# EAGLE board E DX (EAGLE 5.07)
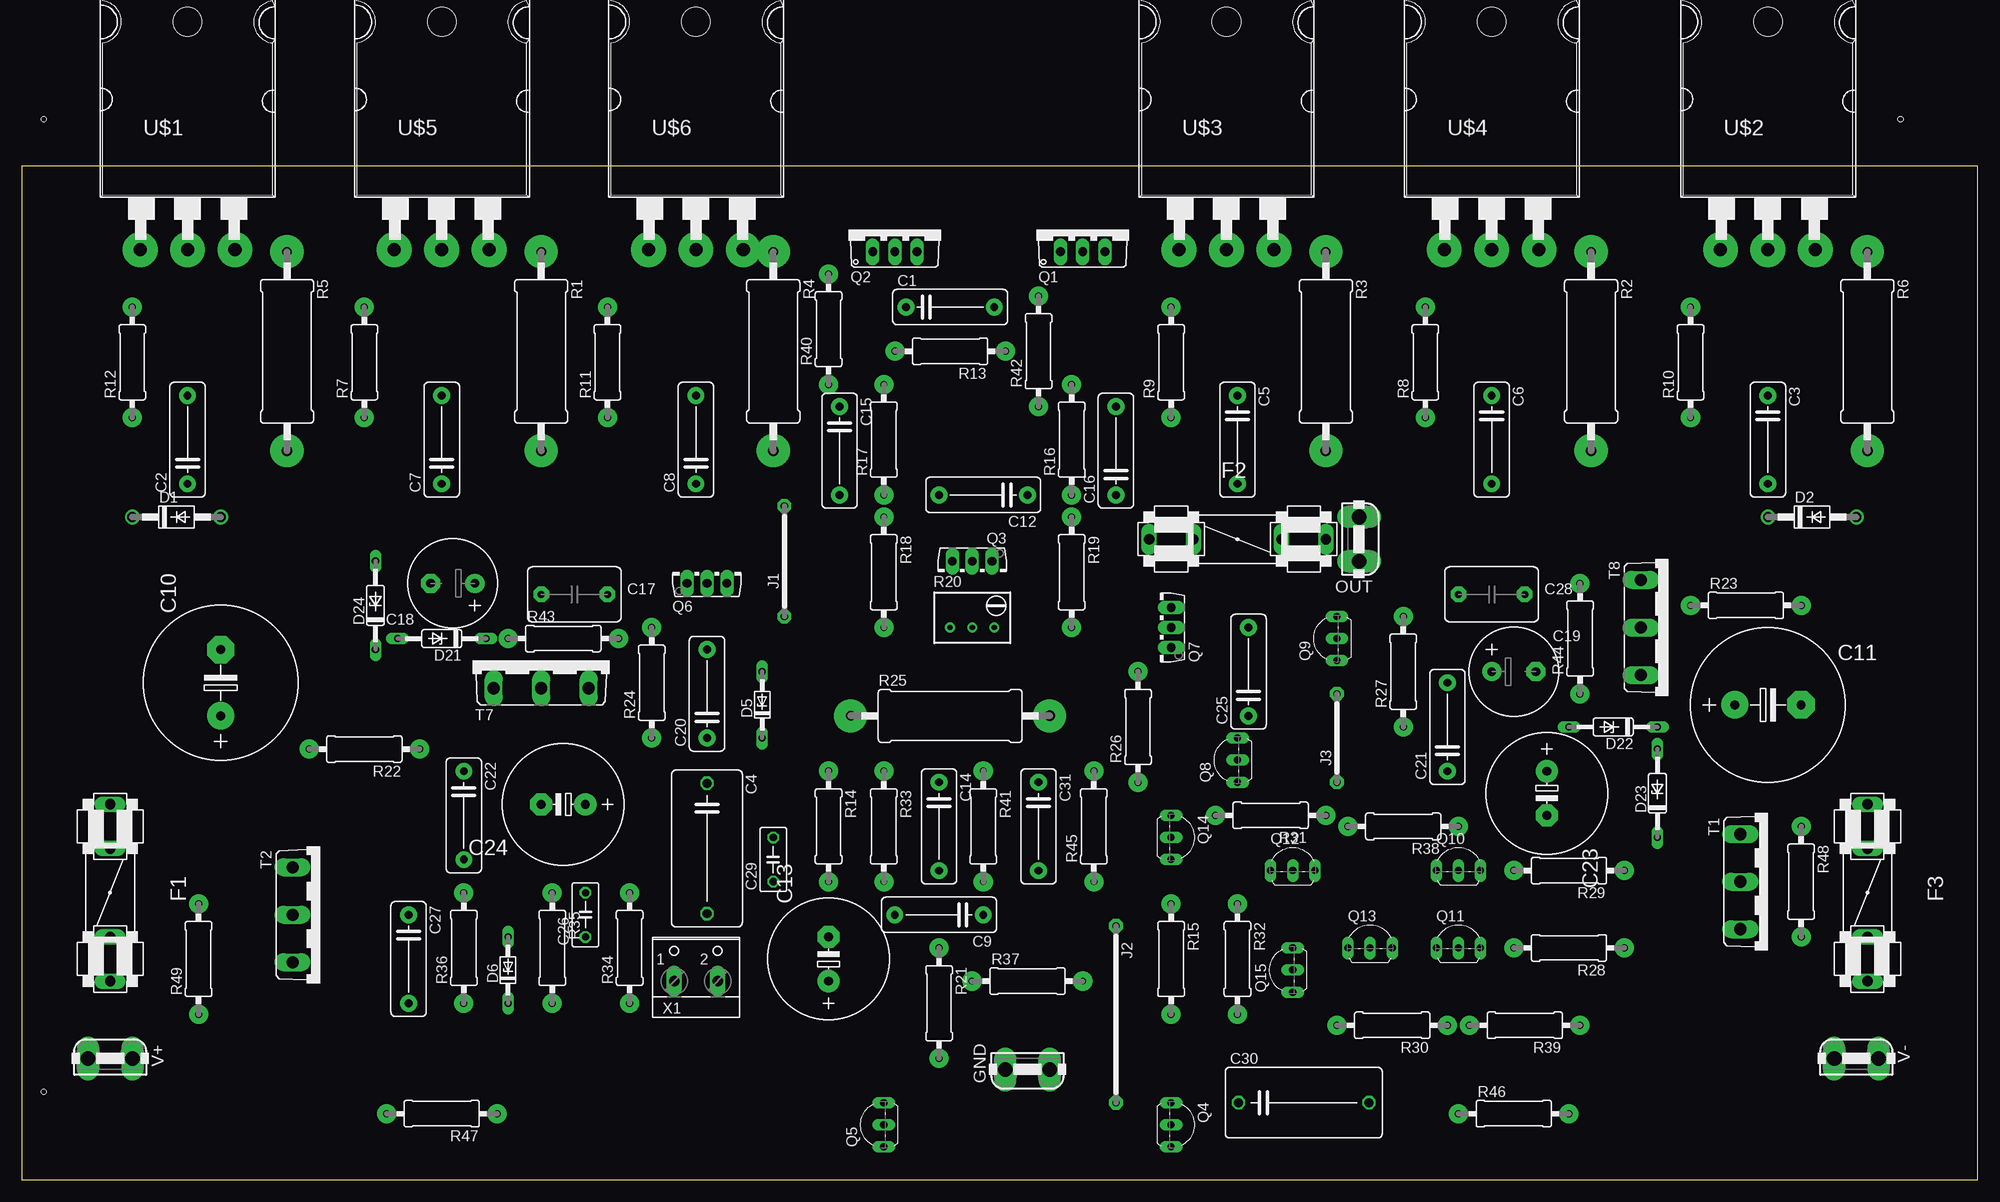
[diagram p0: board, top side]
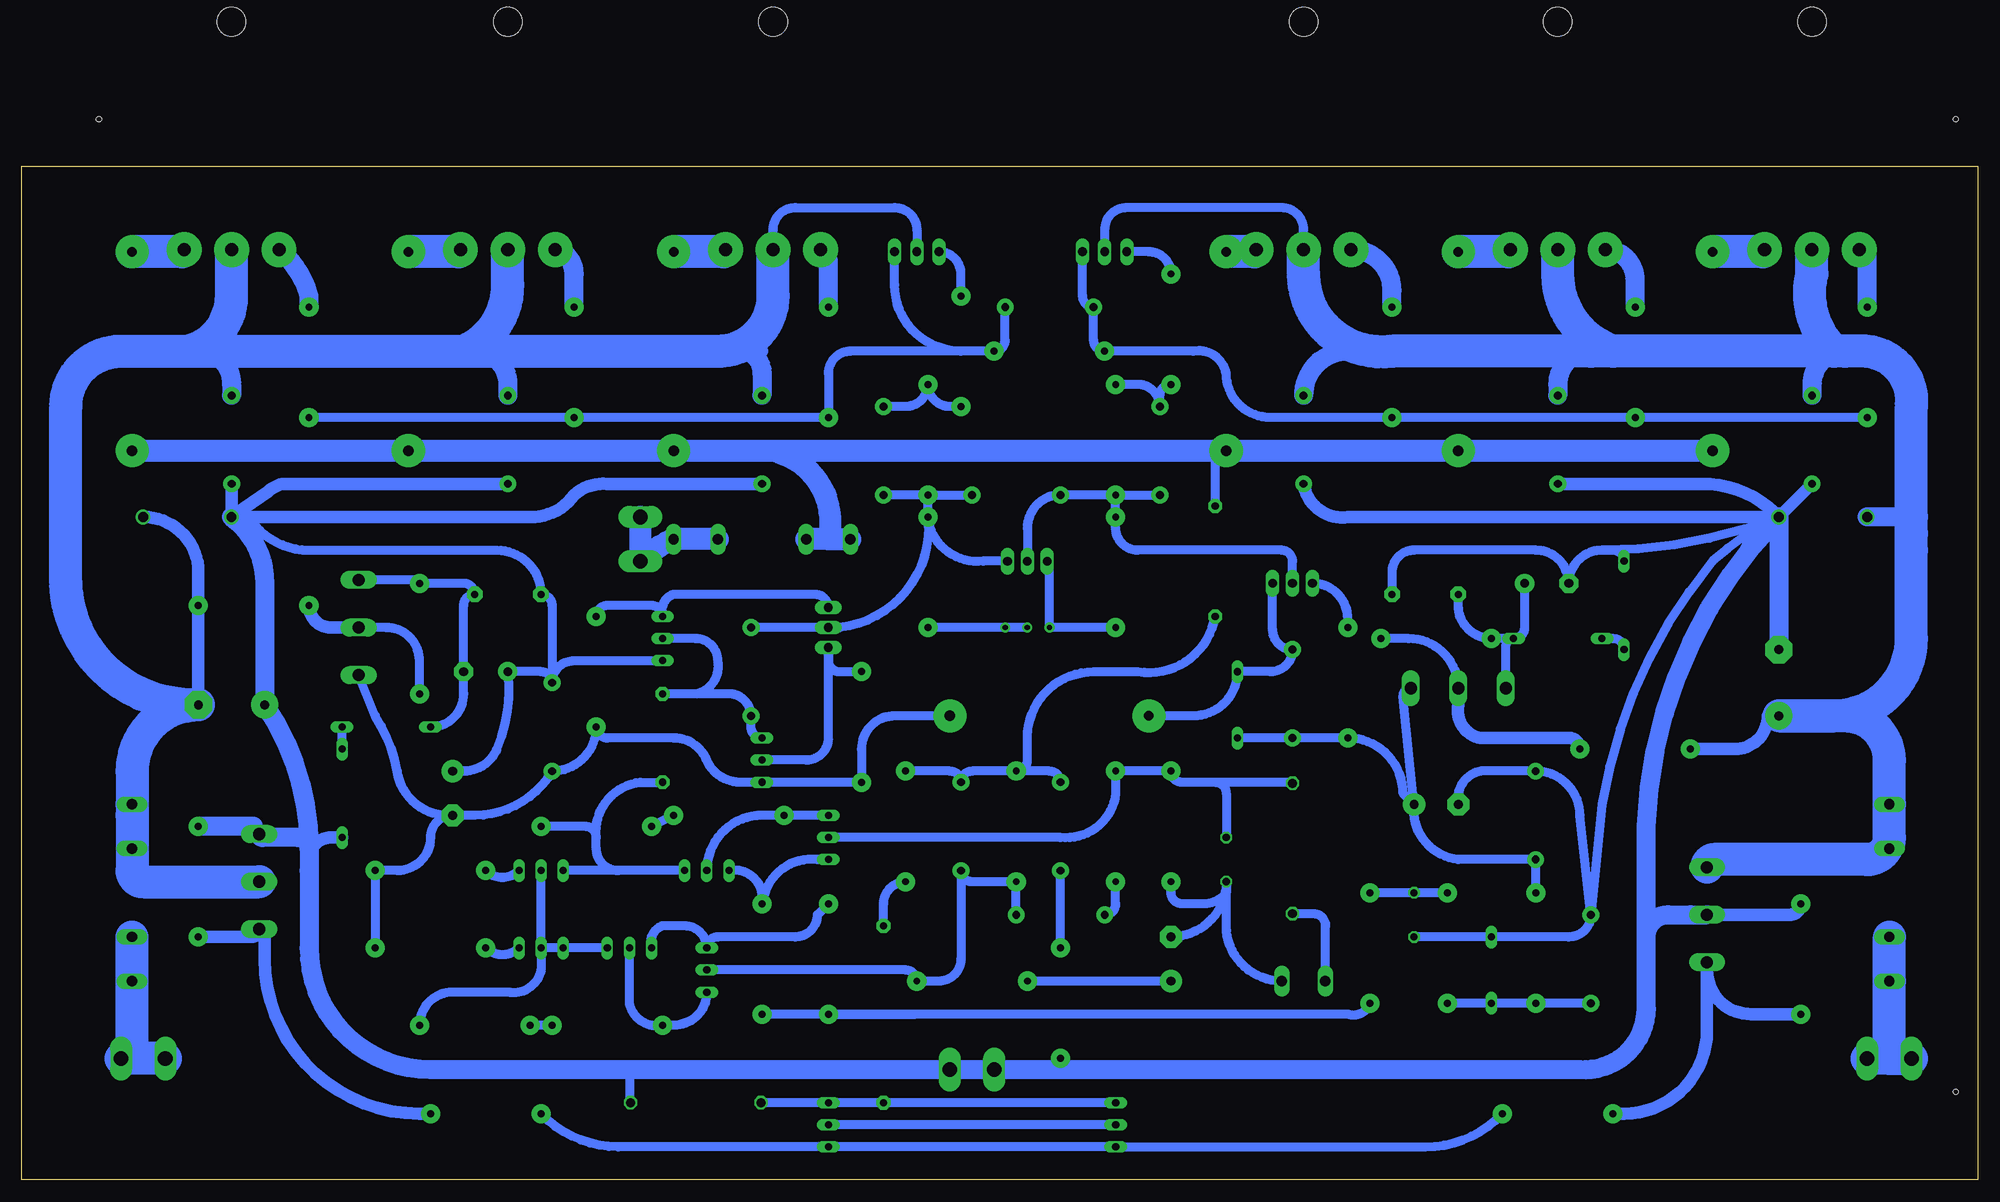
[diagram p1: board, bottom side, seen from below]

Size 224.77 x 116.51 mm. Coordinates in mm from the lower left corner, seen from the top.
Outline: 0,0 224.77,0 224.77,116.51 0,116.51 0,0
Copper layers (1*16): Top 0.035mm / dielectric 1.5mm / Bottom 0.035mm
Design rules "default *": minimum track width 10mil, minimum drill 30mil, track to track 8mil, track to pad 8mil, pad to pad 8mil, via to via 8mil, smd to smd 8mil, copper to edge 40mil, drill to drill 8mil, minimum pad ring 10mil, minimum via ring 8mil, stop-mask expansion 4mil, vias tented up to drill 0mil, thermal gap 10mil
Holes 0.6 mm at 2.54,10.16 2.54,121.92 215.9,121.92

## Footprints (pad centres in the part's own frame; a part is rotated, then mirrored left to right if it is on the bottom)
C102-043X133 = drill 0.9 pad 1.93 round: 1 -5.08,0; 2 5.08,0
C150-084X183 = drill 1.016 octagon: 1 -7.493,0; 2 7.493,0
E7,5-18 = drill 1.016 pad 3.15 round: + -3.81,0 | drill 1.016 pad 3.15 octagon: - 3.81,0
E5-13 = drill 1.016 pad 2.54 round: + -2.54,0 | drill 1.016 pad 2.54 octagon: - 2.54,0
C7,5-11,0X7,0 = drill 0.813 pad 1.778 octagon: 1 -3.81,0; 2 3.81,0
E5,0-10 = drill 1.016 pad 2.184 round: + -2.54,0 | drill 1.016 pad 2.184 octagon: - 2.54,0
C050-030X075 = drill 0.813 octagon: 1 -2.54,0; 2 2.54,0
DO41-10 = drill 1.118 round: A 5.08,0; C -5.08,0
DO34Z7 = drill 0.813 long: A 3.81,0; C -3.81,0
DO35Z10 = drill 0.813 long: A 5.08,0; C -5.08,0
FUSE1 = drill 1.194 long: 1A -10.16,0; 1B -5.08,0; 2A 10.16,0; 2B 5.08,0
FASTON = drill 1.676 pad 2.54 long: 1 -2.54,0; 2 2.54,0
12 = drill 0.813 pad 1.6 octagon: 1 -6.35,0; 2 6.35,0
20 = drill 0.813 pad 1.6 octagon: 1 -10.16,0; 2 10.16,0
10 = drill 0.813 pad 1.6 octagon: 1 -5.08,0; 2 5.08,0
TO220AV = drill 1.016 long: B -2.54,-2.54; C 0,-2.54; E 2.54,-2.54
TO126AV = drill 1.016 long: B 2.286,-1.27; C 0,-1.27; E -2.286,-1.27
TO92-EBC = drill 0.813 long: B 0,-1.27; C -2.54,-1.27; E 2.54,-1.27
TO92-EBC' = drill 0.813 long: B 0,-1.27; C 2.54,-1.27; E -2.54,-1.27
0617/22 = drill 1.1 pad 3.81 round: 1 -11.43,0 | drill 1.2 pad 3.81 round: 2 11.43,0
0309/12 = drill 0.8 pad 2.184 round: 1 -6.35,0; 2 6.35,0
RTRIM3299W = drill 0.61 round: 1 1.27,-2.54; 2 1.27,0; 3 1.27,2.54
TOP3S-1 = drill 1.397 long: A1 -5.461,-3.175; A2 0,-3.175; G 5.461,-3.175
TOP3AV = drill 1.397 long: B -5.461,-3.175; C 0,-3.175; E 5.461,-3.175
TO-264 = drill 1.5 pad 4 round: B -5.45,-6.096; E 5.45,-6.096 | drill 1.499 pad 4 round: C 0,-6.096 | hole 3.3: 0,20.09
W237-102 = drill 1.194 long: 1 -2.5,-1.27; 2 2.5,-1.27

## Placement (x,y rotation side)
C1  .1  [C102-043X133]  106.68,100.33 0 top
C2  .1  [C102-043X133]  19.05,85.09 90 top
C3  .1  [C102-043X133]  200.66,85.09 270 top
C4  10uF  [C150-084X183]  78.74,38.1 270 top
C5  .1  [C102-043X133]  139.7,85.09 270 top
C6  .1  [C102-043X133]  168.91,85.09 270 top
C7  .1  [C102-043X133]  48.26,85.09 90 top
C8  .1  [C102-043X133]  77.47,85.09 90 top
C9  100pF  [C102-043X133]  105.41,30.48 180 top
C10  470uF  [E7,5-18]  22.86,57.15 90 top
C11  470uF  [E7,5-18]  200.66,54.61 0 top
C12  2.2uF  [C102-043X133]  110.49,78.74 180 top
C13  470uF  [E5-13]  92.71,25.4 90 top
C14  .1  [C102-043X133]  105.41,40.64 270 top
C15  68nF  [C102-043X133]  93.98,83.82 270 top
C16  68nF  [C102-043X133]  125.73,83.82 90 top
C17  .1  [C7,5-11,0X7,0]  63.5,67.31 0 top
C18  47uF  [E5,0-10]  49.53,68.58 180 top
C19  47uF  [E5,0-10]  171.45,58.42 0 top
C20  .1  [C102-043X133]  78.74,55.88 90 top
C21  .1  [C102-043X133]  163.83,52.07 90 top
C22  .1  [C102-043X133]  50.8,41.91 270 top
C23  220uF  [E5-13]  175.26,44.45 270 top
C24  220uF  [E5-13]  62.23,43.18 180 top
C25  68pF  [C102-043X133]  140.97,58.42 90 top
C26  10nF  [C050-030X075]  64.77,30.48 90 top
C27  .1  [C102-043X133]  44.45,25.4 270 top
C28  .1  [C7,5-11,0X7,0]  168.91,67.31 0 top
C29  220pF  [C050-030X075]  86.36,36.83 90 top
C30  22uF  [C150-084X183]  147.32,8.89 0 top
C31  27pF  [C102-043X133]  116.84,40.64 270 top
D1  1N4004  [DO41-10]  17.78,76.2 0 top
D2  1N4004  [DO41-10]  205.74,76.2 0 top
D5  4.7V  [DO34Z7]  85.09,54.61 90 top
D6  12V  [DO34Z7]  55.88,24.13 90 top
D21  12V  [DO35Z10]  48.26,62.23 180 top
D22  12V  [DO35Z10]  182.88,52.07 180 top
D23  33V  [DO35Z10]  187.96,44.45 90 top
D24  33V  [DO35Z10]  40.64,66.04 90 top
F1  4A  [FUSE1]  10.16,33.02 270 top
F2  4A  [FUSE1]  139.7,73.66 0 top
F3  4A  [FUSE1]  212.09,33.02 270 top
GND  GND  [FASTON]  115.57,12.7 0 top
J1  J12MM  [12]  87.63,71.12 90 top
J2  J20MM  [20]  125.73,19.05 270 top
J3  J10MM  [10]  151.13,50.8 90 top
OUT  QFIT  [FASTON]  153.67,73.66 90 top
Q1  PNP  [TO220AV]  121.92,109.22 0 top
Q2  NPN  [TO220AV]  100.33,109.22 0 top
Q3  KSC2690  [TO126AV]  109.22,69.85 180 top
Q4  X0202MA  [TO92-EBC]  133.35,6.35 270 top
Q5  X0202MA  [TO92-EBC]  97.79,6.35 90 top
Q6  BD140  [TO126AV]  78.74,69.85 0 top
Q7  KSC2690  [TO126AV]  130.81,63.5 90 top
Q8  BC547C  [TO92-EBC']  138.43,48.26 90 top
Q9  BC546B  [TO92-EBC]  149.86,62.23 90 top
Q10  BC546B  [TO92-EBC]  165.1,36.83 0 top
Q11  BC546B  [TO92-EBC]  165.1,27.94 0 top
Q12  BC546B  [TO92-EBC]  146.05,36.83 0 top
Q13  BC546B  [TO92-EBC]  154.94,27.94 0 top
Q14  BC556A  [TO92-EBC]  133.35,39.37 270 top
Q15  BC556A  [TO92-EBC]  144.78,24.13 90 top
R1  .1R  [0617/22]  59.69,95.25 270 top
R2  .1R  [0617/22]  180.34,95.25 270 top
R3  .1R  [0617/22]  149.86,95.25 270 top
R4  .1R  [0617/22]  86.36,95.25 270 top
R5  .1R  [0617/22]  30.48,95.25 270 top
R6  .1R  [0617/22]  212.09,95.25 270 top
R7  5.6R  [0309/12]  39.37,93.98 90 top
R8  5.6R  [0309/12]  161.29,93.98 90 top
R9  5.6R  [0309/12]  132.08,93.98 90 top
R10  5.6R  [0309/12]  191.77,93.98 90 top
R11  5.6R  [0309/12]  67.31,93.98 90 top
R12  5.6R  [0309/12]  12.7,93.98 90 top
R13  180  [0309/12]  106.68,95.25 180 top
R14  10K  [0309/12]  92.71,40.64 270 top
R15  47R  [0309/12]  132.08,25.4 270 top
R16  100R  [0309/12]  120.65,85.09 90 top
R17  100R  [0309/12]  99.06,85.09 90 top
R18  2.2K  [0309/12]  99.06,69.85 270 top
R19  390  [0309/12]  120.65,69.85 270 top
R20  500R  [RTRIM3299W]  109.22,64.77 270 top
R21  5.6R  [0309/12]  105.41,20.32 270 top
R22  100R  [0309/12]  39.37,49.53 180 top
R23  100R  [0309/12]  198.12,66.04 0 top
R24  390R  [0309/12]  72.39,57.15 90 top
R25  10K  [0617/22]  106.68,53.34 0 top
R26  22R  [0309/12]  128.27,52.07 90 top
R27  1K  [0309/12]  158.75,58.42 90 top
R28  82R  [0309/12]  177.8,26.67 180 top
R29  82R  [0309/12]  177.8,35.56 180 top
R30  1.5K  [0309/12]  157.48,17.78 180 top
R31  1.5K  [0309/12]  143.51,41.91 180 top
R32  47R  [0309/12]  139.7,25.4 270 top
R33  82  [0309/12]  99.06,40.64 270 top
R34  3.6K  [0309/12]  69.85,26.67 90 top
R35  4.7K  [0309/12]  60.96,26.67 270 top
R36  2.2K  [0309/12]  50.8,26.67 90 top
R37  390  [0309/12]  115.57,22.86 0 top
R38  100R  [0309/12]  158.75,40.64 180 top
R39  100R  [0309/12]  172.72,17.78 180 top
R40  100R  [0309/12]  92.71,97.79 90 top
R41  10K  [0309/12]  110.49,40.64 270 top
R42  100R  [0309/12]  116.84,95.25 90 top
R43  1K  [0309/12]  62.23,62.23 0 top
R44  1K  [0309/12]  179.07,62.23 90 top
R45  22K  [0309/12]  123.19,40.64 90 top
R46  10R  [0309/12]  171.45,7.62 0 top
R47  10R  [0309/12]  48.26,7.62 180 top
R48  220R  [0309/12]  204.47,34.29 270 top
R49  220R  [0309/12]  20.32,25.4 90 top
T1  BTA41  [TOP3S-1]  200.66,34.29 270 top
T2  BTA41  [TOP3S-1]  34.29,30.48 270 top
T7  2SC5200  [TOP3AV]  59.69,59.69 0 top
T8  2SA1943  [TOP3AV]  189.23,63.5 270 top
U$1  2SC5200  [TO-264]  19.05,113.03 0 top
U$2  2SA1943  [TO-264]  200.66,113.03 0 top
U$3  2SA1943  [TO-264]  138.43,113.03 0 top
U$4  2SA1943  [TO-264]  168.91,113.03 0 top
U$5  2SC5200  [TO-264]  48.26,113.03 0 top
U$6  2SC5200  [TO-264]  77.47,113.03 0 top
V+  QFIT  [FASTON]  10.16,13.97 180 top
V-  QFIT  [FASTON]  210.82,13.97 180 top
X1  IN  [W237-102]  77.47,24.13 0 top

## Library data of the parts
C1-C16 C20-C27 C29-C31 R1-R49 = resistor
C17-C19 C28 = cap-pan40
D1 D2 D5 D6 D21-D24 = diode
F1-F3 = special
GND OUT V+ V- = keystone
J1-J3 = jumper
Q1-Q3 Q6 Q7 T7 T8 = transistor-power
Q4 Q5 Q9-Q13 = transistor-npn
Q8 = transistor
Q14 Q15 = transistor-pnp
T1 T2 = triac
U$1-U$6 = Rudi_TO264
X1 = con-wago-500

## Nets
AGND: C13.- C29.1 R14.2 X1.2
GND: C2.1 C3.2 C5.2 C6.2 C7.1 C8.1 C10.- C11.+ C17.2 C18.- C19.+ C21.2 C22.1 C23.+ C24.- C26.1 C27.1 C28.1 C30.2 D1.A D2.C D6.A D23.C D24.A GND.1 GND.2 Q9.C R21.2 R48.1 R49.2 T1.A1 T2.A2
N$1: R1.1 U$5.E
N$2: R2.1 U$4.E
N$3: R3.1 U$3.E
N$4: R4.1 U$6.E
N$5: R11.2 U$6.B
N$6: C15.1 R17.2 R40.1
N$7: R7.2 U$5.B
N$8: R8.2 U$4.B
N$9: R9.2 U$3.B
N$10: Q2.B R40.2
N$11: R10.2 U$2.B
N$12: R12.2 U$1.B
N$15: C12.1 C16.1 C25.2 Q3.E Q7.C R16.1 R19.1
N$16: C9.2 R33.2
N$17: C4.2 X1.1
N$18: C1.2 Q1.E R8.1 R9.1 R10.1 R13.1
N$19: C1.1 Q2.E R7.1 R11.1 R12.1 R13.2
N$20: R5.1 U$1.E
N$21: F2.1A J1.2 R1.2 R2.2 R3.2 R4.2 R5.2 R6.2
N$22: R6.1 U$2.E
N$24: R19.2 R20.2 R20.3
N$25: Q3.B R18.2 R20.1
N$26: C2.2 C7.2 C8.2 C10.+ D1.C F1.1A Q2.C R22.2 T2.A1 U$1.C U$5.C U$6.C
N$27: C17.1 C18.+ D21.C R43.1 T7.B
N$28: F1.2A V+.1 V+.2
N$30: C20.2 D5.A Q6.B R25.1
N$31: C12.2 C15.2 Q3.C Q6.C R17.1 R18.1
N$33: J2.1 R45.1
N$34: C21.1 C23.- Q8.E R25.2 R26.1 R27.1 R28.1 R29.1 T8.E
N$35: C20.1 C22.2 C24.+ D5.C R24.1 R36.2 T7.E
N$36: Q6.E R24.2
N$37: C4.1 C29.2 Q14.B R14.1 R33.1
N$38: Q11.E R28.2
N$39: C26.2 R34.2 R35.1
N$40: Q7.B Q9.E R27.2
N$41: Q7.E Q8.B R26.2
N$42: C25.1 J3.2 Q8.C Q9.B
N$43: Q10.E R29.2
N$44: Q13.C Q15.E R15.1
N$45: Q12.B Q14.C R31.2
N$46: Q10.B Q11.B Q11.C Q13.E R39.1
N$47: Q12.C Q14.E R32.1
N$48: F2.2A OUT.1 OUT.2
N$49: R15.2 R32.2 R34.1
N$51: C27.2 D6.C R35.2 R36.1
N$52: F3.2A V-.1 V-.2
N$53: C13.+ R37.1
N$54: Q13.B Q15.C R30.2
N$55: C9.1 C31.2 Q15.B R37.2 R41.2
N$56: R31.1 R38.2
N$57: R30.1 R39.2
N$58: C14.2 R21.1
N$59: C16.2 R16.2 R42.1
N$60: J3.1 Q10.C Q12.E R38.1
N$61: Q1.B R42.2
N$65: D21.A D24.C
N$66: R22.1 R43.2 T7.C
N$67: Q4.B Q5.B
N$68: C19.- C28.2 D22.A R44.2 T8.B
N$69: D22.C D23.A
N$71: R23.1 R44.1 T8.C
N$72: Q4.E Q5.C R46.1 R47.1
N$73: C30.1 J2.2 Q4.C Q5.E
N$74: C3.1 C5.1 C6.1 C11.- D2.A F3.1A Q1.C R23.2 T1.A2 U$2.C U$3.C U$4.C
N$77: R46.2 R48.2 T1.G
N$78: R47.2 R49.1 T2.G
VCCIO: C14.1 C31.1 J1.1 R41.1 R45.2

## Tracks (layer width: path | path; a pad name or v marks a point on that pad's centre or on a via)
AGND
  Bottom 1.016: C29.1 arc90 C13.- | C29.1 86.36,33.02 arc53 88.9,31.75 91.44,31.75 arc90 92.71,33.02 R14.2 | X1.2 arc90 86.36,29.25 C29.1
GND
  Bottom 1.016: C27.1 arc90 46.99,27.94 D6.A C26.1 | 106.68,12.7 R21.2 | C24.- arc90 57.15,46.99 C22.1 arc90 45.72,41.91 C27.1 | C17.2 67.31,69.85 arc90 64.77,72.39 50.8,72.39 arc90 C18.- arc90 43.18,72.39 | C27.1 43.18,43.18 arc30 30.48,71.12 arc18 D1.A arc21 43.18,72.39 | D24.A arc-90 41.91,72.39 43.18,72.39 | C23.+ 173.99,46.99 arc-67 170.18,49.53 arc-29 C19.+ 165.1,58.42 arc90 C21.2 | Q9.C 161.29,59.69 arc-90 C21.2 | C21.2 163.83,66.04 arc-90 C28.1 arc-90 170.18,72.39 191.77,72.39 arc66 199.21,77.21 | C30.2 arc90 154.94,9.02 154.94,12.7
  Bottom 1.422: C3.2 D2.C | C7.1 30.81,80.01 arc45 22.47,75.81 D1.A | C8.1 arc-90 72.39,76.2 D1.A | D1.A C2.1 | C6.2 194.31,80.01 arc-45 196.48,79.11 199.21,77.21 D2.C | C5.2 157.48,80.01 arc-46 161.29,78.74 arc56 166.37,76.2 D2.C | 24.13,74.93 arc-42 26.67,72.39 arc42 D1.A | D23.C 189.23,39.37 arc-90 191.77,36.83 191.77,35.56 | R49.2 arc90 21.59,30.48 33.02,30.48
  Bottom 1.93: GND.1 GND.2
  Bottom 2.184: 38.1,27.94 38.1,20.32 arc99 45.72,12.7 106.68,12.7 GND.1 154.94,12.7 177.8,12.7 arc90 191.77,26.67 191.77,35.56 191.77,38.1 | 38.1,27.94 38.1,40.64 arc42 D1.A C10.- | D2.C arc53 196.85,68.58 C11.+ arc34 191.77,38.1 | 191.77,38.1 arc-90 193.04,39.37 197.1,39.37 arc90 T1.A1 arc90 198.12,40.39 198.12,40.64 R48.1 | T2.A2 33.02,30.48 35.56,30.48 arc-90 38.1,27.94
N$1
  Bottom 3.81: U$5.E 53.96,106.68 R1.1
N$2
  Bottom 3.81: U$4.E 174.61,106.68 R2.1
N$3
  Bottom 3.81: U$3.E 144.13,106.68 R3.1
N$4
  Bottom 3.81: U$6.E 83.17,106.68 R4.1
N$5
  Bottom 2.184: R11.2 67.31,102.22 arc-90 U$6.B
N$6
  Bottom 1.016: R40.1 arc-90 93.98,90.17 C15.1 arc-90 96.52,91.44 R17.2
N$7
  Bottom 2.184: R7.2 39.37,103.49 arc-90 U$5.B
N$8
  Bottom 2.184: R8.2 161.29,104.14 arc-53 162.56,106.68 arc-42 U$4.B
N$9
  Bottom 2.184: R9.2 132.08,105.41 arc-61 U$3.B
N$10
  Bottom 1.016: Q2.B 95.25,106.68 arc90 R40.2
N$11
  Bottom 2.184: R10.2 191.77,101.6 arc-36 U$2.B
N$12
  Bottom 2.184: R12.2 12.7,106.03 arc-90 U$1.B
N$15
  Bottom 1.016: R16.1 C12.1 | C25.2 Q7.C 130.81,63.5 arc-90 R19.1 | R16.1 C16.1 | Q3.E 114.3,71.12 arc90 R19.1 | R19.1 R16.1
N$16
  Bottom 1.016: R33.2 99.06,31.75 arc90 C9.2
N$17
  Bottom 1.016: X1.1 74.97,29.17 arc90 74.93,29.21 arc-90 76.33,30.61 C4.2
N$18
  Bottom 1.016: R10.1 R8.1 R9.1 132.08,92.71 arc90 129.54,95.25 R13.1 | R13.1 116.84,95.25 arc90 124.46,102.87 Q1.E | R13.1 arc-90 111.76,96.52 C1.2
N$19
  Bottom 1.016: R12.1 R7.1 R11.1 81.28,87.63 arc90 86.36,92.71 arc-90 90.17,95.25 R13.2 arc90 101.6,96.52 C1.1 arc90 102.87,101.6 Q2.E
N$20
  Bottom 3.81: U$1.E 24.75,106.68 R5.1
N$21
  Bottom 1.016: R4.2 85.09,83.82 | 87.63,83.82 J1.2
  Bottom 2.54: R5.2 R1.2 R4.2 87.63,83.82 138.43,83.82 | R6.2 R2.2 R3.2 138.43,83.82 | 138.43,83.82 arc90 132.08,73.66 | 132.08,73.66 134.62,73.66 | 132.08,73.66 F2.1A
N$22
  Bottom 3.81: U$2.E 206.36,106.68 R6.1
N$24
  Bottom 1.016: R20.2 R20.3 R19.2
N$25
  Bottom 1.016: R18.2 R20.1 106.68,70.87 arc-90 Q3.B
N$26
  Bottom 1.016: Q2.C 100.33,109.22 arc90 97.79,111.76 80.01,111.76 arc90 77.47,109.22 U$6.C | 15.24,95.25 17.78,95.25
  Bottom 1.422: R22.2 27.94,49.53 arc-90 24.13,53.34 C10.+
  Bottom 2.184: C2.2 19.05,91.44 arc90 15.24,95.25 | C7.2 48.26,91.44 arc90 44.45,95.25 | C8.2 arc90 72.39,95.25 67.31,95.25 | D1.C 7.62,76.2 arc90 7.62,72.39
  Bottom 3.81: 16.51,95.25 15.24,95.25 12.7,95.25 arc90 7.62,88.9 7.62,76.2 7.62,72.39 7.62,62.23 arc90 16.51,53.34 C10.+ 15.24,53.34 arc90 10.16,48.26 F1.1A 10.16,39.37 arc90 12.7,36.83 30.23,36.83 arc-90 T2.A1 | 16.51,95.25 17.78,95.25 41.91,95.25 | U$5.C 48.26,104.14 arc-71 41.91,95.25 | U$1.C 19.05,104.14 arc-59 16.51,95.25 | U$6.C 77.47,104.14 arc-98 67.31,95.25 44.45,95.25 41.91,95.25
N$27
  Bottom 1.016: C18.+ 52.07,63.5 arc90 D21.C | D21.C R43.1 arc90 59.69,66.04 C17.1 | D21.C arc-90 54.23,61.34 T7.B
N$28
  Bottom 3.81: 10.16,27.94 F1.2A 10.16,13.97 | 10.16,13.97 V+.1 | 10.16,13.97 V+.2
N$30
  Bottom 1.016: R25.1 90.17,53.34 arc-90 D5.A 81.28,58.42 arc-90 C20.2 arc90 81.03,63.25 Q6.B
N$31
  Bottom 1.016: R17.1 C12.2 arc-90 109.22,74.93 Q3.C | Q6.C 78.74,71.12 arc-90 80.01,72.39 96.52,72.39 arc90 99.06,74.93 R18.1 R17.1 | R17.1 C15.2
N$33
  Bottom 1.016: R45.1 arc-90 125.73,31.75 J2.1
N$34
  Bottom 1.016: R28.1 R29.1 181.61,35.56 arc-90 177.8,39.37 arc90 C23.- | R25.2 124.46,53.34 arc-90 128.27,49.53 R26.1 Q8.E 142.24,45.72 arc67 146.05,48.26 arc-67 149.86,50.8 157.48,50.8 arc90 R27.1 arc90 C21.1 arc59 172.72,41.91 C23.- | T8.E 184.15,53.34 arc21 181.61,46.99 arc-87 C23.-
N$35
  Bottom 1.016: D5.C C20.1 R24.1 arc90 66.04,44.45 C24.+ | R36.2 C22.2 59.69,36.83 arc90 C24.+ | T7.E arc-90 66.04,55.63 C24.+
N$36
  Bottom 1.016: R24.2 72.39,64.52 arc-90 Q6.E
N$37
  Bottom 1.016: Q14.B 105.41,39.37 arc-90 99.06,44.45 R33.1 R14.1 arc-90 91.44,45.72 87.63,45.72 | C4.1 arc-90 78.87,45.72 87.63,45.72 | C29.2 86.36,44.45 arc-90 87.63,45.72
N$38
  Bottom 1.016: Q11.E arc90 R28.2
N$39
  Bottom 1.016: R35.1 C26.2 R34.2
N$40
  Bottom 1.016: Q7.B arc-90 133.6,67.31 149.86,67.31 arc-90 Q9.E arc-90 152.4,66.04 157.48,66.04 arc-90 R27.2
N$41
  Bottom 1.016: Q8.B 134.62,48.26 arc-90 132.08,50.8 Q7.E 132.08,59.69 arc-90 130.81,58.42 R26.2
N$42
  Bottom 1.016: Q9.B 147.32,62.23 arc90 144.78,59.69 arc90 147.32,55.88 | 147.32,55.88 J3.2 | 147.32,55.88 143.51,55.88 arc90 C25.1 140.97,52.07 arc-90 Q8.C
N$43
  Bottom 1.016: Q10.E arc90 R29.2
N$44
  Bottom 1.016: Q13.C arc90 151.13,29.21 148.59,29.21 arc90 Q15.E arc90 144.78,27.94 135.89,27.94 arc-90 133.35,30.48 R15.1
N$45
  Bottom 1.016: Q12.B arc90 139.7,41.91 R31.2 Q14.C
N$46
  Bottom 1.016: Q13.E Q11.C Q11.B | Q11.B Q10.B | Q11.B 165.1,24.13 arc90 168.91,21.59 175.26,21.59 arc-90 R39.1
N$47
  Bottom 1.016: Q14.E 133.35,36.83 arc-90 R32.1 arc-90 142.24,35.56 Q12.C
N$48
  Bottom 2.54: 144.78,73.66 F2.2A arc-23 OUT.1 OUT.2
N$49
  Bottom 1.016: R15.2 122.07,19.05 | R15.2 R32.2 | R15.2 72.39,19.05 arc-90 R34.1
N$51
  Bottom 1.016: C27.2 R36.1 D6.C R35.2
N$52
  Bottom 3.81: 212.09,27.94 F3.2A 212.09,15.24 arc90 V-.1 V-.2
N$53
  Bottom 1.016: C13.+ R37.1
N$54
  Bottom 1.016: Q13.B 154.94,20.32 arc-90 R30.2 149.86,17.78 arc-90 Q15.C
N$55
  Bottom 1.016: C9.1 R41.2 115.57,34.29 arc90 C31.2 116.84,25.4 arc90 119.38,22.86 R37.2 arc-90 123.19,24.13 Q15.B
N$56
  Bottom 1.016: R31.1 R38.2
N$57
  Bottom 1.016: R30.1 R39.2
N$58
  Bottom 1.016: R21.1 C14.2
N$59
  Bottom 1.016: R42.1 118.11,88.9 arc90 R16.2 arc90 123.19,88.9 C16.2
N$60
  Bottom 1.016: 156.21,35.56 Q10.C | J3.1 153.67,45.72 arc-90 158.75,39.37 | 158.75,39.37 158.75,38.1 arc-90 156.21,35.56 | Q12.E 156.21,35.56 | R38.1 160.02,40.64 arc90 158.75,39.37
N$61
  Bottom 1.016: Q1.B arc90 116.84,104.14 R42.2
N$65
  Bottom 1.016: D21.A 41.91,62.23 arc90 D24.C
N$66
  Bottom 1.016: R43.2 65.41,62.23 arc90 T7.C
  Bottom 1.422: R22.1 arc-90 46.99,50.8 57.15,50.8 arc90 59.69,54.61 T7.C
N$67
  Bottom 1.016: Q5.B Q4.B
N$68
  Bottom 1.016: T8.B 178.69,68.96 arc-90 R44.2 173.99,68.58 arc90 C28.2 arc-90 173.99,66.04 C19.- 173.99,55.88 arc90 D22.A
N$69
  Bottom 1.016: D23.A D22.C
N$71
  Bottom 1.016: R44.1 179.07,59.69 arc-90 182.88,63.5 T8.C
  Bottom 1.422: R23.1 arc-90 189.23,63.5 T8.C
N$72
  Bottom 1.016: R46.1 arc-46 156.21,3.81 Q4.E Q5.C 63.5,3.81 arc-46 R47.1
N$73
  Bottom 1.016: Q5.E J2.2 Q4.C C30.1
N$74
  Bottom 1.016: Q1.C 121.92,109.22 arc-90 124.46,111.76 135.89,111.76 arc-90 138.43,109.22 U$3.C
  Bottom 1.422: 146.05,95.25 arc-45 143.51,95.25 arc38 140.97,95.25 arc-38 139.7,95.25 | 138.43,101.6 arc-56 138.43,100.33 | C11.- R23.2 204.47,69.85 arc-90 D2.A
  Bottom 2.184: C3.1 200.66,91.44 arc-67 203.2,95.25 | C6.1 168.91,91.44 arc-90 172.72,95.25 | C5.1 139.7,92.71 arc-113 143.51,95.25
  Bottom 3.81: 205.74,95.25 213.36,95.25 arc-90 219.71,88.9 219.71,68.58 arc-90 C11.- arc-90 212.09,46.99 F3.1A 212.09,41.91 212.09,35.56 arc-90 210.82,34.29 T1.A2 | 205.74,95.25 203.2,95.25 173.99,95.25 | 173.99,95.25 172.72,95.25 146.05,95.25 144.78,95.25 arc-90 138.43,101.6 U$3.C | U$4.C 168.91,102.87 arc67 173.99,95.25 | U$2.C 200.66,101.6 arc77 205.74,95.25
N$77
  Bottom 1.422: R46.2 179.07,7.62 arc90 196.85,25.4 196.85,28.19 arc-90 T1.G arc90 198.37,27.94 R48.2
N$78
  Bottom 1.422: R47.2 40.64,7.62 arc-90 31.11,17.14 31.11,24.13 | 31.11,24.13 T2.G | R49.1 26.04,19.05 arc90 31.11,24.13
VCCIO
  Bottom 1.016: J1.1 arc90 96.52,58.42 101.6,58.42 arc-90 109.22,50.8 109.22,48.26 arc90 R41.1 | R41.1 115.57,46.99 arc-90 C31.1 arc-90 118.11,46.99 R45.2 | C14.1 arc-90 106.68,46.99 R41.1